# EAGLE board ESP32-ng and OBD-UART-ng brd to gerber (EAGLE 9.6.2)
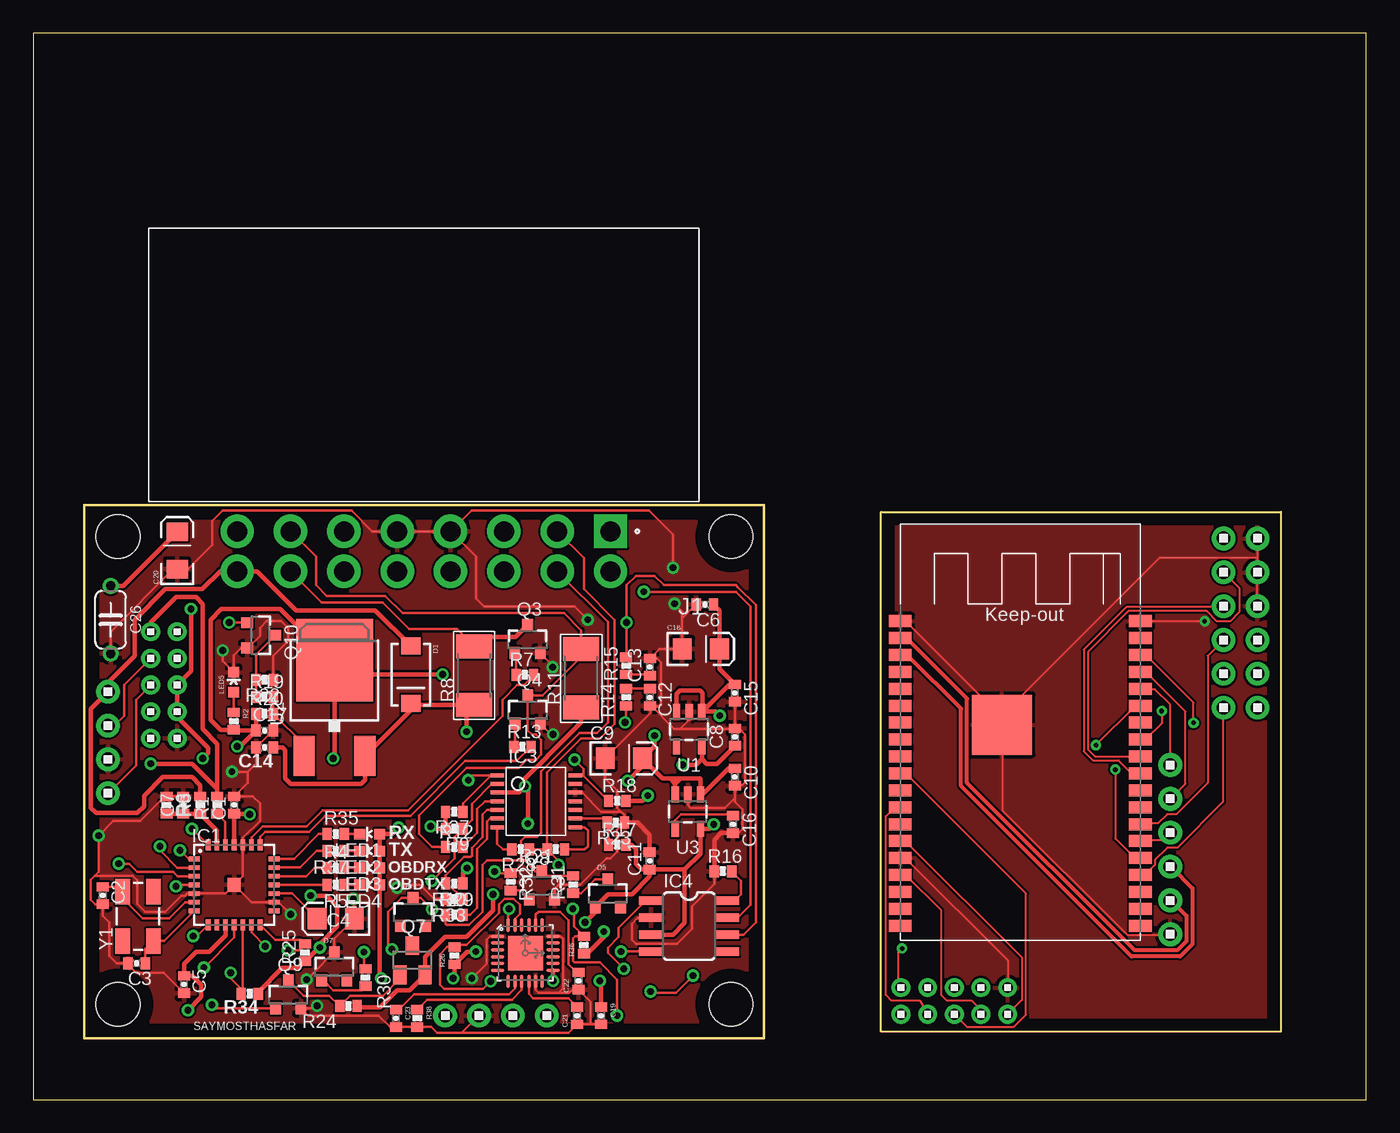
[diagram p0: board, top side]
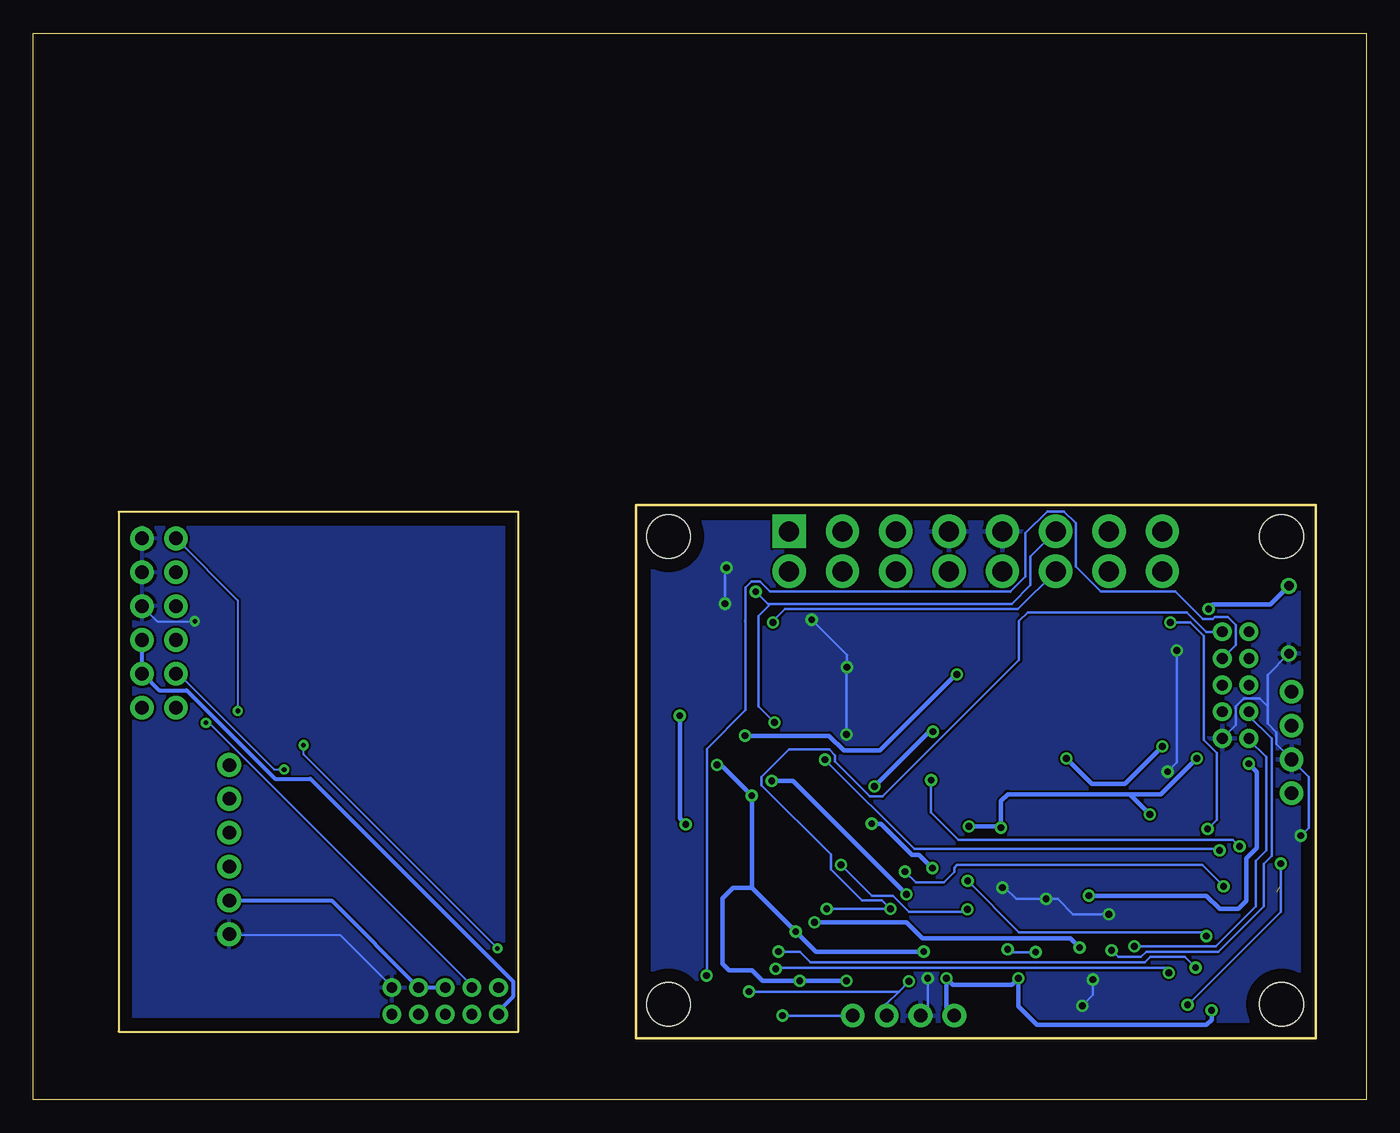
[diagram p1: board, bottom side, seen from below]

Size 100 x 80 mm. Coordinates in mm from the lower left corner, seen from the top.
Outline: 0,0 100,0 100,80 0,80 0,0
Outline: 3.8,4.6 54.8,4.6 54.8,44.6 3.8,44.6 3.8,4.6
Outline: 93.6,5.1 93.6,44.1 63.6,44.1 63.6,5.1 93.6,5.1
Copper layers (1*16): Top 0.035mm / dielectric 1.5mm / Bottom 0.035mm
Design rules "default": minimum track width 6mil, minimum drill 0.35mm, track to track 6mil, track to pad 6mil, pad to pad 6mil, via to via 6mil, smd to smd 6mil, copper to edge 40mil, drill to drill 6mil, minimum pad ring 10mil, minimum via ring 8mil, stop-mask expansion 4mil, vias tented up to drill 0mil, thermal gap 10mil
Net classes: 1 highpower: width 0.305 mm
Milling: 8 lines

## Footprints (pad centres in the part's own frame; a part is rotated, then mirrored left to right if it is on the bottom)
0402-CAP = smd 0.7 x 0.9: 1 -0.65,0; 2 0.65,0
EIA3216 = smd 1.4 x 1.6: A 1.4,0; C -1.4,0
C050-024X044 = drill 0.7: 1 -2.54,0; 2 2.54,0
SMA-DIODE = smd 1.27 x 1.47: A -2.15,0; C 2.15,0
SOT23-3 = smd 0.8 x 0.9: 1 -0.95,-1; 2 0.95,-1; 3 0,1.1
1X4 = drill 1.016 pad 1.778: 1 0,0; 2 2.54,0; 3 5.08,0; 4 7.62,0
2X6 = drill 1.016 pad 1.778: 1 0,0; 2 0,2.54; 3 2.54,0; 4 2.54,2.54; 5 5.08,0; 6 5.08,2.54; 7 7.62,0; 8 7.62,2.54; 9 10.16,0; 10 10.16,2.54; 11 12.7,0; 12 12.7,2.54
1X6 = drill 1.016 pad 1.778: 1 0,0; 2 2.54,0; 3 5.08,0; 4 7.62,0; 5 10.16,0; 6 12.7,0
_STN_SCANTOOL_QFN-28-S = smd 0.85 x 0.35: 1 -3,1.95; 2 -3,1.3; 3 -3,0.65; 4 -3,0; 5 -3,-0.65; 6 -3,-1.3; 7 -3,-1.95; 15 3,-1.95; 16 3,-1.3; 17 3,-0.65; 18 3,0; 19 3,0.65; 20 3,1.3; 21 3,1.95 | smd 0.35 x 0.85: 8 -1.95,-3; 9 -1.3,-3; 10 -0.65,-3; 11 0,-3; 12 0.65,-3; 13 1.3,-3; 14 1.95,-3; 22 1.95,3; 23 1.3,3; 24 0.65,3; 25 0,3; 26 -0.65,3; 27 -1.3,3; 28 -1.95,3 | smd 1 x 1: EXP 0,0
TSSOP-14 = smd 0.305 x 0.991: 1 -1.95,-2.925; 2 -1.3,-2.925; 3 -0.65,-2.925; 4 0,-2.925; 5 0.65,-2.925; 6 1.3,-2.925; 7 1.95,-2.925; 8 1.95,2.925; 9 1.3,2.925; 10 0.65,2.925; 11 0,2.925; 12 -0.65,2.925; 13 -1.3,2.925; 14 -1.95,2.925
SO-8 = smd 0.65 x 1.75: 1 -1.905,-2.873; 2 -0.635,-2.873; 3 0.635,-2.873; 4 1.905,-2.873; 5 1.905,2.873; 6 0.635,2.873; 7 -0.635,2.873; 8 -1.905,2.873
COMTECH_C-OBD-II-16M = drill 1.5 pad 2.5 square: 1 0,0 | drill 1.5 pad 2.5: 2 4,0; 3 8,0; 4 12,0; 5 16,0; 6 20,0; 7 24,0; 8 28,0; 9 0,3; 10 4,3; 11 8,3; 12 12,3; 13 16,3; 14 20,3; 15 24,3; 16 28,3
STAND-OFF = hole 3.302: 0,0
LED-0603 = smd 0.8 x 0.8: A 0,-0.75; C 0,0.75
SOT23 = smd 1 x 1.4: 1 -0.95,-1.1; 2 0.95,-1.1; 3 0,1.1
0402-RES = smd 0.7 x 0.9: 1 -0.65,0; 2 0.65,0
2010 = smd 1.8 x 2.7: 1 -2.2,0; 2 2.2,0
SOT23-5 = smd 0.55 x 1.2: 1 -0.95,-1.3; 2 0,-1.3; 3 0.95,-1.3; 4 0.95,1.3; 5 -0.95,1.3
V-REG_DPACK = smd 1.6 x 3: 1 -2.28,-4.8; 3 2.28,-4.8 | smd 5.8 x 6.2: 4 0,2.38
QFN-24-4MM2 = smd 1.016 x 0.254: 1 -2.066,1.257; 2 -2.066,0.75; 3 -2.066,0.247; 4 -2.066,-0.287; 5 -2.066,-0.792; 6 -2.066,-1.297; 13 2.086,-1.297; 14 2.086,-0.792; 15 2.086,-0.287; 16 2.086,0.247; 17 2.086,0.75; 18 2.086,1.257 | smd 0.254 x 1.016: 7 -1.267,-2.122; 8 -0.762,-2.122; 9 -0.258,-2.122; 10 0.278,-2.122; 11 0.78,-2.122; 12 1.287,-2.122; 19 1.287,2.082; 20 0.78,2.082; 21 0.278,2.082; 22 -0.258,2.082; 23 -0.762,2.082; 24 -1.267,2.082 | smd 2.616 x 2.616: P$1 0.02,-0.01
ESP32-WROVER = smd 1.7 x 0.9: CLK 18,1.27; CMD 0,1.27; EN 0,21.59; GND 0,24.13; GND3 18,24.13; GND_2 0,6.35; IO0 18,7.62; IO2 18,6.35; IO4 18,8.89; IO5 18,12.7; IO12 0,7.62; IO13 0,5.08; IO14 0,8.89; IO15 18,5.08; IO18 18,13.97; IO19 18,15.24; IO21 18,17.78; IO22 18,21.59; IO23 18,22.86; IO25 0,12.7; IO26 0,11.43; IO27 0,10.16; IO32 0,15.24; IO33 0,13.97; IO34 0,17.78; IO35 0,16.51; NC0 18,16.51; NC1 18,10.16; NC2 18,11.43; RXD0 18,19.05; SD0 18,2.54; SD1 18,3.81; SD2 0,3.81; SD3 0,2.54; SENSOR_VN 0,19.05; SENSOR_VP 0,20.32; TXD0 18,20.32; VDD33 0,22.86 | smd 4.5 x 4.5: GND2 7.62,16.34
2X5 = drill 0.8 pad 1.422: 1 -4,-1; 2 -4,1; 3 -2,-1; 4 -2,1; 5 0,-1; 6 0,1; 7 2,-1; 8 2,1; 9 4,-1; 10 4,1
CRYSTAL-SMD-5X3 = smd 1.9 x 1.1: 1 -1.85,-1.15; 2 1.85,-1.15; 3 1.85,1.15; 4 -1.85,1.15

## Placement (x,y rotation side)
C1  1uF  [0402-CAP]  15.07,22.09 90 top
C2  27pF  [0402-CAP]  5.21,15.31 270 top
C3  27pF  [0402-CAP]  7.75,10.23 180 top
C4  10uF ESR<=5  [EIA3216]  22.69,13.57 180 top
C5  1uF  [0402-CAP]  11.3,8.63 270 top
C6  1uF  [0402-CAP]  50.38,37.14 180 top
C7  0.1uF  [0402-CAP]  11.26,22.09 90 top
C8  4.7uF  [0402-CAP]  52.65,27.2 90 top
C9  10uF  [EIA3216]  44.3,25.61 0 top
C10  0.1uF  [0402-CAP]  52.63,24.2 270 top
C11  1uF  [0402-CAP]  46.25,17.91 90 top
C12  560pF  [0402-CAP]  46.25,30.18 270 top
C13  560pF  [0402-CAP]  46.25,32.44 90 top
C14  0.1uF  [0402-CAP]  17.35,26.41 180 top
C15  2.2uF  [0402-CAP]  52.62,30.5 270 top
C16  470pF  [0402-CAP]  52.5,20.65 270 top
C17  1uF  [0402-CAP]  17.35,27.68 0 top
C18  10uF  [EIA3216]  50.08,33.81 0 top
C19  0.1uF  [0402-CAP]  42.6,6.3 270 top
C20  10uF  [EIA3216]  10.8,41.2 90 top
C21  0.1uF  [0402-CAP]  40.8,6.3 90 top
C22  0.1uF  [0402-CAP]  40.9,8.9 90 top
C23  0.1uF  [0402-CAP]  27.2,6.1 270 top
C26  100N(TH)  [C050-024X044]  5.8,36 270 top
D1  MBRA140  [SMA-DIODE]  28.33,31.88 270 top
D5  [SOT23-3]  43.1,15.43 0 top
D6  [SOT23-3]  28.49,14.03 0 top
D7  [SOT23-3]  22.58,9.93 0 top
H1  1X4  [1X4]  30.9,6.3 0 top
H2  2X6  [2X6]  89.3,42.1 270 top
H3  1X4  [1X4]  5.6,30.6 270 top
H4  1X6  [1X6]  85.3,12.4 90 top
IC1  SCANTOOL  [_STN_SCANTOOL_QFN-28-S]  15.07,16.11 0 top
IC3  LM339PWR  [TSSOP-14]  37.73,22.38 270 top
IC4  MCP2551  [SO-8]  49.2,13.01 270 top
J1  C-OBD-II-16M  [COMTECH_C-OBD-II-16M]  43.3,42.63 180 top
JP4  STAND-OFF  [STAND-OFF]  6.34,7.14 0 top
JP5  STAND-OFF  [STAND-OFF]  52.34,42.24 0 top
JP6  STAND-OFF  [STAND-OFF]  52.34,7.14 0 top
JP7  STAND-OFF  [STAND-OFF]  6.34,42.24 0 top
LED1  YELLOW  [LED-0603]  25.23,19.92 90 top
LED2  RED  [LED-0603]  25.23,18.65 90 top
LED3  YELLOW  [LED-0603]  25.23,17.38 90 top
LED4  RED  [LED-0603]  25.23,16.11 90 top
LED5  RED  [LED-0603]  15.03,31.31 0 top
Q3  MMBT2222  [SOT23-3]  37.08,34.51 0 top
Q4  MMBT2222  [SOT23-3]  37.09,29.21 0 top
Q7  ZXMP6A13FTA  [SOT23]  28.44,10.46 0 top
Q8  MMBT2222  [SOT23-3]  38.16,16.03 0 top
Q9  BSS138  [SOT23-3]  19.13,7.85 0 top
Q10  BSS138  [SOT23-3]  17.05,34.83 270 top
R1  10k  [0402-RES]  13.8,22.09 90 top
R2  1k  [0402-RES]  15.04,28.39 270 top
R3  62K  [0402-RES]  12.53,22.09 90 top
R4  330  [0402-RES]  22.69,17.38 0 top
R5  330  [0402-RES]  22.69,16.11 180 top
R6  10K  [0402-RES]  9.99,22.09 270 top
R7  1k  [0402-RES]  36.88,31.87 0 top
R8  510 0.5W  [2010]  33.07,31.81 90 top
R9  10k  [0402-RES]  31.58,20.32 180 top
R10  10k  [0402-RES]  31.58,16.21 180 top
R11  510 0.5W  [2010]  41.1,31.61 90 top
R12  10k  [0402-RES]  31.58,18.95 0 top
R13  1k  [0402-RES]  36.69,26.47 0 top
R14  100  [0402-RES]  44.48,30.18 270 top
R15  100  [0402-RES]  44.48,32.54 90 top
R16  4.7k  [0402-RES]  51.74,17.12 0 top
R17  1.2k  [0402-RES]  43.81,19.11 0 top
R18  10k  [0402-RES]  43.81,22.42 0 top
R19  866  [0402-RES]  17.35,30.22 0 top
R20  240  [0402-RES]  17.35,28.95 0 top
R21  10k  [0402-RES]  39.2,18.77 0 top
R22  374  [0402-RES]  17.35,31.49 180 top
R23  4.7k  [0402-RES]  43.71,20.78 180 top
R24  1.5k  [0402-RES]  23.64,7.02 180 top
R25  4.7k  [0402-RES]  20.38,11.03 90 top
R26  10k  [0402-RES]  31.6,10.8 90 top
R27  10k  [0402-RES]  31.58,21.59 180 top
R28  10k  [0402-RES]  36.56,18.77 180 top
R29  10k  [0402-RES]  31.58,13.87 0 top
R30  10k  [0402-RES]  24.93,9.16 270 top
R31  10k  [0402-RES]  40.5,16.13 90 top
R32  1k  [0402-RES]  35.82,16.33 270 top
R33  10k  [0402-RES]  31.58,15.04 180 top
R34  1.5k  [0402-RES]  16.24,7.94 180 top
R35  330  [0402-RES]  22.69,19.92 0 top
R36  10k  [0402-RES]  41.3,11.6 90 top
R37  330  [0402-RES]  22.69,18.65 180 top
R38  10k  [0402-RES]  28.8,6.1 270 top
U1  3.3V  [SOT23-5]  49.2,27.78 180 top
U2  V_REG_317DPACK  [V-REG_DPACK]  22.6,30.59 0 top
U3  5V Reg.  [SOT23-5]  49.1,21.6 180 top
U4  MPU-6050-1  [QFN-24-4MM2]  36.9,11 0 top
U$1  ESP32-WROVER  [ESP32-WROVER]  65.05,11.77 0 top
U$4  2X5  [2X5]  69.1,7.4 180 top
U$14  2X5  [2X5]  9.8,31.1 90 top
Y1  16MHz  [CRYSTAL-SMD-5X3]  7.85,13.74 90 top

## Library data of the parts
C1-C23 D1 D5-D7 IC1 JP4-JP7 LED1-LED5 Q3 Q4 Q7-Q10 R1-R7 R9 R10 R12-R38 U1-U3 Y1 = SparkFun
C26 = capacitors; MOUSER: 81-RCER71H104K0A2H3B
H1-H4 = headers(.1in)
IC3 = _stn_logic; DESC: IC, Quad Comparator; MANUF: Texas Instruments; PARTNUM: LM339PWR; SUPPLIER: Digikey:296-6607-1-ND; VALSTAT: PARTNUM
IC4 = _stn_microchip; DESC: IC, CAN Transceiver; MANUF: Microchip Technology; PARTNUM: MCP2551-I/SN; SUPPLIER: Digikey:MCP2551-I/SN-ND; VALSTAT: PARTNUM
J1 = C-OBD-II-16M; AVAILABILITY: Not in stock; DESCRIPTION: OBD II 16pin 90 Degree Angle Male Plug Connector; MF: Comtech Electronic Co., LTD; MP: C-OBD-II-16M; PACKAGE: None; PRICE: None
R8 R11 = _stn_rcl; DESC: Resistor; VALSTAT: VAL
U4 = Testing
U$1 = ESP32-Wrover
U$4 U$14 = headers(2mm)

## Nets
3.3V [highpower]: C1.1 C5.1 C8.1 C19.1 C20.A C26.1 H1.1 IC1.10 IC1.25 LED1.A LED2.A LED3.A LED4.A R9.2 R18.2 R26.1 R27.2 R36.1 U1.5 U4.13 U$14.3 U$14.5
3.3V1 [highpower]: H4.2 U$1.VDD33 U$4.3 U$4.5
5V [highpower]: C6.1 C11.1 C15.1 C18.A D5.1 IC4.3 R1.2 R17.2 R25.1 R34.1 U1.1 U1.3 U3.5 U$14.10
5V1 [highpower]: H2.8 H2.10 U$4.10
!ISO_K_TX: IC1.22 R13.2
!ISO_L_TX: IC1.23 R7.2
!ISO_RX: IC1.8 IC3.2 R9.1
!OBD_RX_STATUS!/PGC: IC1.19 R4.1
!PWR_SAVE: IC1.15
!VPW_RX: IC1.1 IC3.14 R18.1
BATT_V [highpower]: C7.1 IC1.27 R3.1 R6.2
CAN_HI: IC4.7 J1.6 R14.2
CAN_LO: IC4.6 J1.14 R15.2
CAN_RX: IC1.11 IC4.4
CAN_TX: IC1.12 IC4.1 R34.2
EN [highpower]: H4.3 U$1.EN
GND: C1.2 C2.2 C3.2 C4.C C5.2 C6.2 C7.2 C8.2 C9.C C10.2 C11.2 C12.2 C13.2 C14.2 C15.2 C16.2 C17.2 C18.C C19.2 C20.C C21.1 C22.1 C23.2 C26.2 D7.3 H1.2 H3.3 IC1.5 IC1.16 IC1.24 IC1.EXP IC3.12 IC4.2 J1.4 J1.5 LED5.C Q3.2 Q4.2 Q8.2 Q9.2 Q10.2 R6.1 R16.1 R22.1 R23.1 R33.2 R38.2 U1.2 U3.2 U4.1 U4.11 U4.18 U$14.1
GND1: H2.2 H2.4 H2.6 H4.1 U$1.GND U$1.GND2 U$1.GND3 U$1.GND_2 U$4.1
HOST_PRESENT: IC1.9
IO0: H4.4 U$1.IO0
IO2: H2.9 U$1.IO2
IO4: H2.7 U$1.IO4
IO5: H2.5 U$1.IO5
IO14: U$1.IO14
IO15: H2.11 U$1.IO15
IO18: H2.3 U$1.IO18
IO19: H2.1 U$1.IO19
IO26: U$1.IO26
IO32: U$1.IO32
IO33: U$1.IO33
IO34: U$1.IO34
IO35: U$1.IO35
J1850BUS+: D6.3 J1.2 R21.1 R28.1 R30.1
J1850BUS+_TX: IC1.3 Q9.1
J1850BUS-: J1.10 Q8.3 R29.1 R31.2
J1850BUS-_TX: IC1.4 R32.1
K-LINE: J1.7 Q4.3 R11.2 R12.1
L-LINE: J1.15 Q3.3 R8.2
N$1: IC3.7 R28.2
N$2: H2.12
N$3: IC3.6 R29.2
N$4: Q4.1 R13.1
N$5: Q3.1 R7.1
N$6: IC3.5 R10.2 R33.1
N$7: IC3.8 R21.2
N$8: R19.2 R20.2 U2.1
N$9: D6.1 Q7.3
N$10: C12.1 R14.1
N$11: IC4.8 R16.2
N$12: IC3.9 R17.1 R23.2
N$13: IC3.4 R12.2
N$14: D5.3 R31.1
N$15: C21.2 U4.10
N$16: C22.2 U4.20
N$17: H3.4 U$14.6
N$18: Q7.1 Q9.3 R24.2
N$20: H3.2 U$14.8
N$22: Q10.3 R19.1 R22.2
N$23: R38.1 U4.9
N$24: D7.1 R30.2
N$25: Q8.1 R32.2
N$26: C4.A IC1.17
N$27: C13.1 R15.1
N$28: C23.1 U4.8
N$30: LED3.C R4.2
N$31: LED4.C R5.1
N$32: LED5.A R2.1
N$34: C16.1 U3.4
N$35: LED1.C R35.2
N$36: LED2.C R37.1
N$51: U$1.IO23
OSC1: C2.1 IC1.6 Y1.3
OSC2: C3.1 IC1.7 Y1.1
PWM/!VPW: IC1.28 Q10.1
PWM_RX: IC1.2 IC3.1 R27.1
RESET: IC1.26 R1.1
RST_NVM: IC1.18 R5.2
RX: H4.6 U$1.RXD0
RX-GSM: U$1.IO27 U$4.8
RX-I: IC1.13 U$14.2
RX-OBD: U$1.IO13 U$4.4
RX-STAT: IC1.21 R35.1
SCL_ESP: H1.3 R26.2 U4.23 U$14.7
SCL_MPU: U$1.IO22 U$4.7
SDA_ESP: H1.4 R36.2 U4.24 U$14.9
SDA_MPU: U$1.IO21 U$4.9
TX: H4.5 U$1.TXD0
TX-GSM: U$1.IO25 U$4.6
TX-O: IC1.14 R25.2 U$14.4
TX-OBD: U$1.IO12 U$4.2
TX-STAT: IC1.20 R37.2
VBAT [highpower]: C14.1 D1.C IC3.3 R8.1 R10.1 R11.1 U2.3
VBATT_RAW [highpower]: D1.A H3.1 J1.16 R3.2
VCC [highpower]: C9.A C10.1 C17.1 Q7.2 R2.2 R20.1 R24.1 U2.4 U3.1 U3.3

## Tracks (layer width: path | path; a pad name or v marks a point on that pad's centre or on a via)
3.3V  (via drill 0.51)
  Top 0.356: IC1.25 C1.1 16.2,21.44 v16.24,21.4 | U1.5 50.15,25.55 | 50.15,25.55 50.5,25.2 51.3,25.2 C8.1 | R18.2 45.72,22.42 v46.1,22.8 | v48.7,25.1 49.7,25.1 50.15,25.55 | v42.8,12.6 42.8,12.2 41.55,10.95 R36.1 | v33.2,11.1 32.55,11.1 R26.1 31.6,9.2 v31.5,9.1 | C26.1 6.74,38.54 C20.A | IC1.10 14.42,12.32 13.2,11.1 12.2,11.1 11.3,10.2 C5.1 11.92,9.28 12.6,8.6 12.6,7.7 v11.6,6.7 | R27.2 R9.2 29.98,20.32 v29.8,20.5 | v12.7,25.6 13.1,26 13.1,26.4 10.8,28.7 U$14.3 U$14.5 11.84,32.14 11.84,36.8 v11.83,36.81 | v27.4,20.4 26.92,19.92 LED1.A LED2.A LED3.A LED4.A 25.98,9.22 v26.1,9.1 | v38.99,8.9 U4.13 | v42.5,8.9 42.6,8.8 C19.1
  Bottom 0.356: v48.7,25.1 48.4,25.1 v46.1,22.8 46.1,15.9 | 46.1,15.9 v42.8,12.6 41.3,11.1 v33.2,11.1 | H1.1 31.5,6.9 v31.5,9.1 31,8.6 26.6,8.6 v26.1,9.1 26.1,7 24.7,5.6 12,5.6 11.6,6 v11.6,6.7 | v12.7,25.6 15.4,22.9 17.74,22.9 | 17.74,22.9 26.9,22.9 27.4,22.4 v27.4,20.4 27.5,20.5 v29.8,20.5 | v16.24,21.4 17.74,22.9 | v11.83,36.81 11.5,37.14 7.2,37.14 C26.1 | 46.1,15.9 47.5,15.9 48.3,15.1 48.3,10.2 47.8,9.7 46.1,9.7 45.3,8.9 v42.5,8.9 v38.99,8.9
3.3V1
  Top 0.305: U$1.VDD33 65.1,34.59 65.56,34.59 70.05,30.09 70.05,23.77 82.63,11.2 85.83,11.2 86.51,11.88 86.51,13.79 85.37,14.93 H4.2
  Bottom 0.305: H4.2 77.63,14.93 U$4.3 U$4.5
5V  (via drill 0.51)
  Top 0.356: U1.3 48.25,30.45 48.5,30.7 50,30.7 50.2,30.5 50.2,29.13 | R17.2 44.89,19.11 45.2,18.8 45.2,17.7 45.64,17.26 C11.1 | C11.1 48.86,17.26 | 48.86,17.26 50.05,18.45 U3.5 50.72,20.3 v51.05,20.64 | 48.86,17.26 48.86,13.26 47.98,12.38 IC4.3 | C11.1 46.25,16.75 44.9,15.4 43.12,15.4 D5.1 42.15,14.05 v41.4,13.3 | R34.1 16.89,8.09 18.68,9.88 19.88,9.88 R25.1 21.4,11.4 v21.5,11.4 21.5,11.7 22.8,13 22.8,14.5 22,15.3 v20.8,15.3 | C6.1 51.48,36.69 C18.A 51.48,32.29 C15.1 52.22,31.15 50.2,29.13 | U1.1 50.2,29.13 | v51.5,28.8 51.17,29.13 50.2,29.13 | R1.2 13.8,23.32 | U$14.10 8.8,35.8 10.7,37.7 12.2,37.7 12.7,37.2 12.7,27.8 13.8,26.7 13.8,23.32 | v8.8,25.2 11.91,25.2 13.8,23.32
  Bottom 0.356: v51.05,20.64 51.5,21.09 v51.5,28.8 | v21.5,11.4 22.2,12.1 33.3,12.1 34.5,13.3 v41.4,13.3 | v20.8,15.3 12,15.3 11,14.3 9.6,14.3 9,14.9 9,18.1 8.2,18.9 8.2,24.6 v8.8,25.2
5V1
  Bottom 0.305: U$4.10 64.88,6.62 64.88,6.86 64.01,7.72 64.01,8.89 79.2,24.07 81.86,24.07 88.5,30.7 90.55,30.7 91.77,31.92 H2.10 91.85,32.08 91.85,34.44 H2.8
!ISO_K_TX
  Top 0.203: IC1.22 17.02,19.72 17.4,20.1 20.7,20.1 21.9,21.3 28.3,21.3 32.4,25.4 36.27,25.4 R13.2
!ISO_L_TX
  Top 0.203: IC1.23 16.37,19.67 17.2,20.5 20.5,20.5 21.7,21.7 28.1,21.7 35.2,28.8 35.2,30 36.3,31.1 36.8,31.1 37.53,31.83 R7.2
!ISO_RX  (via drill 0.51)
  Top 0.203: IC3.2 34.38,23.68 32.9,22.2 32.9,20.99 R9.1 31.6,19.69 31.6,18.1 v29.9,16.4 | IC1.8 12.27,12.26 v12,12.26
  Bottom 0.203: v12,12.26 12.3,12.56 26.06,12.56 v29.9,16.4
!OBD_RX_STATUS!/PGC
  Top 0.203: IC1.19 20.46,16.76 21.1,17.4 22.02,17.4 R4.1
!VPW_RX  (via drill 0.51)
  Top 0.203: IC3.14 41.25,24.33 41.29,24.29 | 41.29,24.29 R18.1 | IC1.1 11.64,18.06 v11,18.7 | v40.6,25.5 41.29,24.81 41.29,24.29
  Bottom 0.203: v11,18.7 11.1,18.8 33.9,18.8 v40.6,25.5
BATT_V
  Top 0.356: IC1.27 13.77,20.2 R3.1 C7.1 R6.2
CAN_HI  (via drill 0.51)
  Top 0.203: v44.4,28.3 44.48,28.38 R14.2 | IC4.7 52.84,13.64 53.8,14.6 53.8,37 52.7,38.1 v45.8,38.1
  Bottom 0.203: J1.6 25.2,40.73 25.2,38.6 26.6,37.2 44.7,37.2 | 44.7,37.2 45.6,36.3 45.6,29.5 v44.4,28.3 | v45.8,38.1 44.9,37.2 44.7,37.2
CAN_LO  (via drill 0.51)
  Top 0.203: R15.2 44.5,33.21 v44.5,35.8 44.5,38.6 45.2,39.3 46.6,39.3 47.3,38.6 52.7,38.6 52.84,38.46 52.85,38.46 54.2,37.1 54.2,13.3 53.27,12.38 IC4.6
  Bottom 0.203: J1.14 26.13,36.8 43.6,36.8 44.5,35.9 v44.5,35.8
CAN_RX  (via drill 0.51)
  Top 0.203: IC1.11 15.07,12.17 v12.8,9.9 | v44.1,11.1 v44.1,11.11 IC4.4
  Bottom 0.203: v12.8,9.9 13.6,10.7 16.2,10.7 16.6,10.3 41.7,10.3 42.5,11.1 v44.1,11.1
CAN_TX  (via drill 0.51)
  Top 0.203: IC1.12 15.72,8.07 R34.2 15.59,8.31 14.8,9.1 v14.8,9.5 | v44.3,9.8 43.1,11 43.1,11.4 43.9,12.2 43.9,12.9 45.91,14.91 IC4.1 45.81,14.91
  Bottom 0.203: v14.8,9.5 14.8,9.7 15,9.9 44.2,9.9 v44.3,9.8
EN
  Top 0.305: U$1.EN 65.1,33.29 65.64,33.29 69.6,29.33 69.6,23.54 82.4,10.74 86.06,10.74 86.97,11.65 86.97,15.84 85.37,17.44 H4.3
GND  (via drill 0.51)
  Top 0.203: C6.2 48.68,36.09 | 48.68,36.09 C18.C 46.97,33.81 C13.2 46.81,33.09 47.1,32.8 47.1,29.7 46.89,29.49 46.29,29.49 | C15.2 52.62,27.87 C8.2 52.59,27.8 | U1.2 49.2,28.5 48.5,27.8 | 48.5,27.8 48.08,27.8 46.29,29.59 46.29,29.49 | 46.29,29.49 C12.2 | 48.5,27.8 52.59,27.8 | U3.2 49.1,22.1 49.3,21.9 51.9,21.9 52.63,22.63 | 52.63,22.63 C10.2 52.68,23.6 53.2,23.6 53.4,23.8 53.4,27.4 53,27.8 52.59,27.8 | 52.63,22.63 52.63,22.33 53.21,21.75 53.21,20.84 53.2,20.84 53.2,20.3 52.9,20 C16.2 | IC3.12 41.17,23.03 42.6,21.6 44.1,21.6 | 44.1,21.6 44.36,21.34 R23.1 43.8,20.22 43.8,18.59 43.31,18.1 43,18.1 41,16.1 39.4,16.1 39.11,15.81 Q8.2 | R16.1 51.09,16.19 49.4,14.5 49.4,12.8 48.3,11.7 45.2,11.7 44.9,12 44.9,13.2 45.34,13.64 IC4.2 | H1.2 32.15,5.01 | 32.15,5.01 30.28,5.01 29.83,5.45 R38.2 C23.2 26.75,5.45 25.9,6.3 20.63,6.3 Q9.2 21.11,6.85 v21.3,7.04 | 41.8,5.65 C21.1 40.16,5.01 32.15,5.01 | 41.8,5.65 C19.2 | 41.8,5.65 41.8,7.35 C22.1 40.45,8.25 40.2,8 39.4,8 | 39.4,8 37.9,8 37.68,8.22 U4.11 | 39.1,12.26 U4.18 39.53,12.26 39.75,12.04 39.75,9.86 39.75,9.85 39.75,8.35 39.4,8 | R33.2 30.06,15.04 29,16.1 28,16.1 27.8,15.9 v27.3,15.9 | 46.29,29.49 46.29,29 C9.C 42.9,24.1 43.8,23.2 43.8,21.9 44.1,21.6 | J1.4 J1.5 25.43,42.63 23.86,44.19 14.2,44.19 13.4,43.39 13.4,41.6 11.6,39.8 C20.C 10.5,39.8 5.8,35.1 C26.2 | J1.4 33.2,40.73 33.2,37.6 33.8,37 40.6,37 v41.6,36 | v38.96,32.44 38.96,32.58 Q3.2 | Q4.2 38.85,27.4 v39,27.4 | C17.2 16.73,26.41 C14.2 16.7,25.21 16.09,24.6 | C7.2 R6.1 9.84,22.74 8,20.9 6,20.9 v4.9,19.8 4.9,17.1 4.6,16.8 | IC1.EXP 15.72,16.76 IC1.24 15.72,19.62 17,20.9 17,22.21 16.47,22.74 C1.2 16.09,23.76 16.09,24.6
  Top 0.203: IC1.EXP 14.42,15.46 IC1.5 11.56,15.46 11.4,15.3 11.1,15.3 9.9,14.1 8.4,14.1 7.8,14.7 7.8,16.44 7.44,16.8 4.6,16.8 | IC1.EXP 16.37,14.81 IC1.16 18.39,14.81 v19.3,13.9 | C5.2 9.78,9.5 7.7,9.5 7.1,10.1 C3.2 6.27,10.23 5.7,10.8 5.7,13.3 5.21,13.79 C2.2 4.64,14.66 4.3,15 4.3,16.5 4.6,16.8 | J1.4 32.86,44.19 46.21,44.19 48,42.4 v48,39.9 | v48.1,37.2 48.68,36.62 48.68,36.09 | R22.1 18,33.3 19.1,34.4 19.1,35.4 18.6,35.9 17.5,35.9 17,35.4 17,34.8 16.08,33.88 Q10.2 15.58,33.88 15.03,33.33 LED5.C 14.2,32.89 v14.2,33.7 | v20.5,9 20.98,9.48 22.52,11.03 D7.3 22.58,12.06 C4.C 24.3,13.57 24.01,13.86 v24.01,15.05 | v14.9,24.6 16.09,24.6 | U4.1 34.26,12.26 34,12 34,10.2 v32.9,9.1
  Top 0.356: R23.1 45.32,20.78 46.25,19.85 C11.2 | C16.2 51.6,20 51.09,19.49 R16.1
  Bottom 0.203: v41.6,36 38.96,33.36 v38.96,32.44 39,32.4 v39,27.4 | v48,39.9 48.1,39.8 v48.1,37.2 | v4.9,19.8 4.3,20.4 4.3,24.22 H3.3 6.74,26.66 6.74,27.55 7.4,28.2 7.4,29.5 | v21.3,7.04 20.5,7.84 v20.5,9 | v19.3,13.9 22,13.9 23.15,15.05 v24.01,15.05 26.25,15.05 27.1,15.9 v27.3,15.9 | U$14.1 9.8,28.1 9.8,29.5 9.2,30.1 8,30.1 7.4,29.5 | v14.2,33.7 14.2,25.3 v14.9,24.6 | C26.2 7.4,31.86 7.4,29.5 | v32.9,9.1 32.9,6.84 H1.2
  pour Top: 2.9,45.1 55.2,45.1 55.7,44.6 55.7,4.6 55,3.9 3.6,3.9 3.3,3.6 3.3,44.6 2.9,45
  pour Bottom: 2.6,46.2 3.1,46.7 54.3,46.7 55.1,46.7 56.8,45 57.2,44.6 57.2,3.5 55.6,1.9 54.2,1.9 3.1,1.9 1.3,3.7 1.3,44.9
GND1  (via drill 0.35)
  Top 0.152: U$1.GND_2 65.1,18.05 65.48,18.05 73.1,10.44 U$4.1 | 91.85,40.69 91.85,42.06 H2.2 | 91.85,40.69 91.85,39.62 H2.4 91.85,39.54 H2.6 | v87.89,35.88 83.08,35.88 U$1.GND3 | U$1.GND 65.1,35.88 65.48,35.88 72.64,28.72 72.64,28.11 U$1.GND2 | 91.85,40.69 84.53,40.69 72.64,28.8 U$1.GND2 | H4.1 85.29,12.34 82.09,12.34 72.72,21.71 72.72,28.04 U$1.GND2
  Bottom 0.152: H4.1 85.29,12.34 76.99,12.34 73.1,8.45 U$4.1 | v87.89,35.88 90.7,35.88 91.77,36.95 H2.6
  pour Top: 62.8,4.5 62.8,45.5 62.4,45.9 95.1,45.9 95.8,45.2 95.8,5.4 93.1,2.7 91.3,4.5
  pour Bottom: 61.2,3.4 61.2,46.7 62.2,47.7 94.1,47.7 96.2,45.6 96.2,3.7 94.7,2.2 62.4,2.2
IO0
  Top 0.152: U$1.IO0 83.08,19.43 84.76,19.43 85.29,19.96 H4.4
IO2  (via drill 0.35)
  Top 0.152: v81.18,24.76 81.18,19.58 82.63,18.13 83.01,18.13 U$1.IO2
  Bottom 0.152: v81.18,24.76 81.94,24.76 89.1,31.92 89.26,31.92 H2.9
IO4
  Top 0.152: U$1.IO4 83.08,20.72 84.38,20.72 85.07,21.41 85.75,21.41 88.11,23.77 88.11,33.29 89.26,34.44 H2.7
IO5
  Top 0.152: U$1.IO5 83.01,24.53 82.32,24.53 81.41,25.45 79.5,25.45 78.82,26.13 78.82,33.75 82.02,36.95 89.26,36.95 H2.5
IO15
  Top 0.152: U$1.IO15 83.08,16.91 83.47,16.91 84.15,17.6 84.15,17.98 85.07,18.89 85.83,18.89 89.26,22.32 89.26,29.33 H2.11
IO18
  Top 0.152: U$1.IO18 83.01,25.75 79.66,25.75 79.12,26.28 79.12,33.6 82.17,36.65 88.04,36.65 88.8,35.88 89.79,35.88 90.48,36.57 90.48,38.4 89.33,39.54 H2.3
IO19  (via drill 0.35)
  Top 0.152: v84.66,29.16 84.66,28.24 83.47,27.05 83.08,27.05 U$1.IO19
  Bottom 0.152: v84.66,29.16 84.66,37.46 89.26,42.06 H2.1
J1850BUS+  (via drill 0.51)
  Top 0.203: J1.2 41.3,40.63 41.3,38.3 43.6,36 43.6,28.2 42.5,27.1 41.1,27.1 38.55,24.55 R21.1 | R21.1 R28.1 | R21.1 39.4,17.92 v39.4,17.6 | v29.92,14.28 29.07,15.13 D6.3 27.63,15.13 26.6,14.1 26.6,11.56 v26.9,11.26 | R30.1 24.8,9.94 v24.8,11.06
  Bottom 0.203: v39.4,17.6 37.1,15.3 35.5,15.3 34.3,14.1 30.1,14.1 v29.92,14.28 | v24.8,11.06 26.7,11.06 v26.9,11.26
J1850BUS+_TX  (via drill 0.51)
  Top 0.203: v13.4,7.1 13.65,6.85 Q9.1 | v6.4,17.7 7.2,17.7 7.8,17.1 10.5,17.1 10.84,16.76 IC1.3
  Bottom 0.203: v6.4,17.7 6.4,14.1 v13.4,7.1
J1850BUS-
  Top 0.203: J1.10 43.1,35.83 43.1,28.3 42.3,27.5 41,27.5 38.1,24.6 38.1,20 37.8,19.7 36.9,19.7 36.6,19.4 36.6,18.19 36.86,17.93 | R31.2 38.22,16.78 38.16,16.84 Q8.3 37.66,17.13 36.86,17.93 | R29.1 30.93,13.17 31,13.1 32.7,13.1 33.7,14.1 33.7,17.6 34.03,17.93 36.86,17.93
J1850BUS-_TX  (via drill 0.51)
  Top 0.203: R32.1 34.72,16.98 v34.6,17.1 | IC1.4 10.8,16.1 v10.7,16
  Bottom 0.203: v10.7,16 12.3,17.6 30.7,17.6 30.9,17.4 30.9,17.1 31.7,16.3 33.8,16.3 v34.6,17.1
K-LINE
  Top 0.203: J1.7 21.2,40.73 21.2,38.6 22,37.8 26.4,37.8 27.7,36.5 39.8,36.5 41.1,35.2 R11.2 41.1,33.21 38.2,30.31 Q4.3 37.09,27.71 37.4,27.4 37.7,27.4 38.1,27 38.1,25.9 37.7,25.5 37,25.5 36.4,24.9 32.5,24.9 28.93,21.33 28.93,19.95 29.93,18.95 R12.1
L-LINE
  Top 0.203: J1.15 21.63,37.3 26.2,37.3 28.2,35.3 31.78,35.3 R8.2
  Top 0.356: R8.2 33.76,34.7 36.17,34.7 Q3.3
N$1
  Top 0.203: IC3.7 34.8,19.2 35.23,18.77 R28.2
N$3
  Top 0.203: IC3.6 34.28,21.08 34.06,20.86 34.06,19.55 33.3,18.8 33.3,14.4 32.77,13.87 R29.2
N$4
  Top 0.203: Q4.1 36.14,26.57 R13.1
N$5
  Top 0.203: R7.1 36.23,33.41 Q3.1
N$6
  Top 0.203: IC3.5 34.03,21.73 33.7,21.4 33.7,19.7 32.9,18.9 32.9,18.3 32.8,18.2 32.3,18.2 30.93,16.83 R10.2 31.06,16.21 R33.1
N$7
  Top 0.203: IC3.8 41.37,20.43 41.6,20.2 41.6,19 41.37,18.77 R21.2
N$8
  Top 0.203: R19.2 R20.2 20.32,26.63 U2.1
N$9
  Top 0.203: D6.1 28.44,12.13 Q7.3
N$10
  Top 0.203: C12.1 R14.1
N$11
  Top 0.203: R16.2 53.1,16.41 53.1,15.4 52.62,14.91 IC4.8
N$12
  Top 0.203: IC3.9 42.76,21.08 R23.2 43.16,20.68 R17.1
N$13
  Top 0.203: R12.2 33.3,20.02 33.3,21.8 33.88,22.38 IC3.4
N$14
  Top 0.203: R31.1 41.08,15.48 42.13,16.53 D5.3
N$15
  Top 0.203: C21.2 40.15,7.6 37.5,7.6 37.18,7.92 U4.10
N$16
  Top 0.203: U4.20 37.68,13.88 37.9,14.1 39.5,14.1 40.14,13.46 40.14,10.16 40.6,9.7 40.75,9.7 C22.2
N$17
  Top 0.203: U$14.6 7.7,30 7.7,25.08 H3.4
N$18
  Top 0.203: Q9.3 20.28,7.8 22.21,7.8 R24.2 23.77,7.8 26.23,7.8 27.49,9.06 Q7.1
N$20
  Top 0.203: U$14.8 6.8,31.1 6.8,28.8 6.06,28.06 H3.2
N$22
  Top 0.203: R19.1 R22.2 16.7,33.32 16.75,33.38 16.75,33.43 Q10.3
N$23
  Top 0.203: R38.1 29.55,7.5 35.9,7.5 36.64,8.24 U4.9
N$24
  Top 0.203: D7.1 21.77,8.93 22.5,8.2 24.62,8.2 R30.2
N$25
  Top 0.203: R32.2 36.56,15.68 Q8.1
N$26
  Top 0.203: IC1.17 19.4,15.46 C4.A
N$27
  Top 0.203: R15.1 46.15,31.89 C13.1
N$28
  Top 0.203: U4.8 36.14,8.34 35.7,7.9 28.55,7.9 27.4,6.75 C23.1
N$30
  Top 0.203: R4.2 LED3.C
N$31
  Top 0.203: R5.1 LED4.C
N$32
  Top 0.203: LED5.A R2.1
N$34
  Top 0.203: U3.4 48.15,20.95 48.6,21.4 52.4,21.4 C16.1
N$35
  Top 0.203: R35.2 LED1.C
N$36
  Top 0.203: R37.1 LED2.C
OSC1  (1 unrouted)
  Top 0.203: C2.1 6.33,15.96 Y1.3 | IC1.6 11.41,14.81 10.2,13.6 8.2,13.6 6.53,15.27 6.53,15.96
OSC2
  Top 0.203: C3.1 8.4,11.29 Y1.1 9.8,11.89 IC1.7
PWM/!VPW  (via drill 0.51)
  Top 0.203: IC1.28 11.93,20.3 v11.9,20.3 | v14.7,35.8 16.03,35.8 Q10.1
  Bottom 0.203: v11.9,20.3 11.2,21 11.2,26 12.2,27 12.2,34.8 13.2,35.8 v14.7,35.8
PWM_RX  (via drill 0.51)
  Top 0.203: R27.1 32.23,22.23 34.33,24.33 | 34.33,24.33 IC3.1 | v32.64,23.96 33.01,24.33 34.33,24.33 | IC1.2 10.8,17.4 9.5,18.7 v9.5,19
  Bottom 0.203: v9.5,19 10,19.5 30.6,19.5 32.64,21.54 v32.64,23.96
RESET
  Top 0.203: IC1.26 14.4,19.13 14.4,20.84 R1.1
RST_NVM
  Top 0.203: IC1.18 R5.2
RX
  Top 0.152: U$1.RXD0 83.08,30.78 84.15,30.78 85.29,29.64 85.29,25.14 H4.6
RX-GSM
  Top 0.152: U$1.IO27 65.03,21.86 64.57,21.86 63.96,21.25 63.96,7.85 64.4,7.42 66.51,7.42 U$4.8
RX-I  (via drill 0.51)
  Top 0.203: IC1.13 16.37,12.53 v17.4,11.5
  Bottom 0.203: v17.4,11.5 11.3,11.5 8.3,14.5 8.3,17.9 7.5,18.7 7.5,25.7 8.8,27 U$14.2
RX-OBD
  Top 0.152: U$1.IO13 65.1,16.84 65.48,16.84 68.12,14.19 68.12,7.82 68.53,7.42 70.41,7.42 71.1,6.72 U$4.4
RX-STAT
  Top 0.203: IC1.21 19.56,18.06 21.42,19.92 R35.1
SCL_ESP  (via drill 0.51)
  Top 0.203: v34.3,8.86 33.74,8.3 30.8,8.3 30.5,8.6 30.5,10.9 31.05,11.45 R26.2 31.75,11.6 32.51,11.6 34.93,14.02 34.93,14.63 35.36,15.06 36.04,15.06 36.5,14.6 36.5,13.93 36.14,13.57 U4.23 | v49.5,9.3 48.2,8 46.4,8 v46.3,8.1
  Bottom 0.203: 35.06,8.1 35.98,7.18 H1.3 | 46.56,35.94 46.56,38.42 46.12,38.86 45.48,38.86 44.75,38.13 26.68,38.13 25.56,39.25 25.56,42.5 23.92,44.13 22.68,44.13 21.8,43.25 21.8,40 19.91,38.12 14.32,38.12 12.25,36.05 11.51,36.05 11.36,36.2 10.4,36.2 9.8,35.6 9.8,34.1 U$14.7 | 46.56,35.94 46.6,35.9 | 46.56,35.94 46.56,29.22 49.46,26.32 49.46,9.34 v49.5,9.3 | v46.3,8.1 35.06,8.1 | 35.06,8.1 v34.3,8.86
SCL_MPU  (via drill 0.35)
  Top 0.152: v87.05,28.27 87.05,29.79 83.54,33.29 83.08,33.29 U$1.IO22
  Bottom 0.152: v87.05,28.27 86.82,28.27 66.97,8.42 U$4.7
SDA_ESP  (via drill 0.51)
  Top 0.203: U4.24 35.63,14.36 v35.69,14.3 | v40.47,14.3 40.57,14.2 40.57,12.98 R36.2 40.65,12.25 40.5,12.1 40.5,10.4 40.6,10.3 42.5,10.3 43.8,9 v43.8,6.3
  Bottom 0.203: v40.47,14.3 v35.69,14.3 36.34,14.94 37.82,14.94 40.16,17.28 40.16,18.38 45.36,23.58 45.36,24.22 43.32,26.26 40.28,26.26 39.84,25.82 39.84,25.36 37.22,22.74 36.28,22.74 26.05,32.97 26.05,35.91 25.4,36.56 13.46,36.56 12,35.1 U$14.9 | v43.8,6.3 H1.4
SDA_MPU  (via drill 0.35)
  Top 0.152: v79.73,26.59 82.63,29.48 83.01,29.48 U$1.IO21 | v65.18,11.33 64.88,11.03 64.88,8.62 U$4.9
  Bottom 0.152: v79.73,26.59 79.73,25.89 v65.18,11.33
TX
  Top 0.152: U$1.TXD0 83.08,32.08 83.47,32.08 86.44,29.1 86.44,23.69 85.37,22.63 H4.5
TX-GSM
  Top 0.152: U$1.IO25 65.1,24.45 65.48,24.45 74.47,15.46 74.47,6.37 73.54,5.43 70.07,5.43 U$4.6
TX-O  (via drill 0.51)
  Top 0.203: IC1.14 18.15,11.98 20.08,11.98 R25.2 19.9,11.2 v19.1,11.2
  Bottom 0.203: v19.1,11.2 18.6,10.7 16.9,10.7 16.5,11.1 11.1,11.1 7.7,14.5 7.7,17.7 7.1,18.3 7.1,27.1 8.8,28.8 U$14.4
TX-OBD
  Top 0.152: U$1.IO12 65.1,19.35 65.48,19.35 74.17,10.66 74.17,7.47 U$4.2
TX-STAT
  Top 0.203: IC1.20 20.01,17.41 21.25,18.65 R37.2
VBAT  (via drill 0.51)
  Top 0.356: C14.1 18.69,26.41 18.9,26.2 18.9,24.1 19.3,23.7 24.6,23.7 24.9,24 24.9,25.77 U2.3 28.33,29.24 D1.C 28.45,29.61 R8.1 32.5,29.04 v32.5,27.6 | IC3.3 36.43,23.03 v36.9,23.5 | v36.9,23.5 36.9,24.09 38.53,25.72 38.53,25.73 41.1,28.3 R11.1 | R10.1 32.23,17.05 v32.54,17.36 | v37.1,20.7 37.1,23.3 v36.9,23.5
  Bottom 0.356: v36.9,23.5 32.8,27.6 v32.5,27.6 | v32.54,17.36 33.55,18.37 34.08,18.37 36.41,20.7 v37.1,20.7
VBATT_RAW
  Top 0.356: D1.A 25.66,36.7 19.73,36.7 16.8,39.63 J1.16 14,39.63 12.67,38.3 9.9,38.3 7.6,36 7.6,33.3 5.6,31.3 H3.1 4.3,29.3 4.3,21.9 4.7,21.5 7.8,21.5 8.3,22 8.3,22.8 9.7,24.2 11.9,24.2 12.53,23.57 R3.2
VCC  (via drill 0.51)
  Top 0.356: C10.1 52.15,24.85 50.2,22.9 U3.1 50.05,24.05 50,24.1 48.55,24.1 | 48.55,24.1 48.3,24.1 | 48.15,23.7 48.15,23.95 48.3,24.1 | 48.15,23.7 U3.3 48.15,22.65 | 45.76,25.55 C9.A 46.6,26.51 v46.6,27.3 | 45.76,25.55 47.21,24.1 47.9,24.1 | 47.9,24.1 48.3,24.1 | 48.15,23.7 47.9,23.95 47.9,24.1 | 48.15,23.7 48.55,24.1 | C17.1 15.1,27.68 R2.2 14.06,27.74 13.3,28.5 13.3,36 14.1,36.8 18.5,36.8 20.16,35.14 20.16,34.35 20.65,33.86 21.32,33.86 21.96,33.22 21.96,32.97 | R20.1 C17.1 | R24.1 24.39,6.92 26.02,6.92 27.3,8.2 28.23,8.2 Q7.2 29.39,10.69 30.9,12.2 32.5,12.2 34.5,14.2 v34.5,15.4 | v44.6,23.9 45.76,25.05 45.76,25.55 | C17.1 15.52,26.5 v15.3,26.5 | v22.5,25.6 22.6,25.7 U2.4 22.21,32.58 22.21,32.41 | 22.21,32.41 21.64,31.84 21.1,31.84 | 22.21,32.41 22.71,31.9 v30.7,31.9
  Bottom 0.356: v44.6,23.9 43,23.9 v34.5,15.4 | v22.5,25.6 20.6,23.7 18.1,23.7 v15.3,26.5 | v46.6,27.3 40.3,27.3 39.2,26.2 36.5,26.2 30.8,31.9 v30.7,31.9

## Text on the board
tPlace: RX | TX | OBDRX | OBDTX | SAYMOSTHASFAR